# Altium PCB medusa-ai-integrated.PcbDoc (part 2 of 2)
Units mil, origin at the board's own origin, x right, y up, seen from the top; angles counter-clockwise.
Board outline 7750 x 7750 mil, 4 copper layers (Top Layer, Layer 1, Layer 2, Bottom Layer), stack 23.756 mil thick; 101 components, 83 nets, 484 pads, 157 vias.
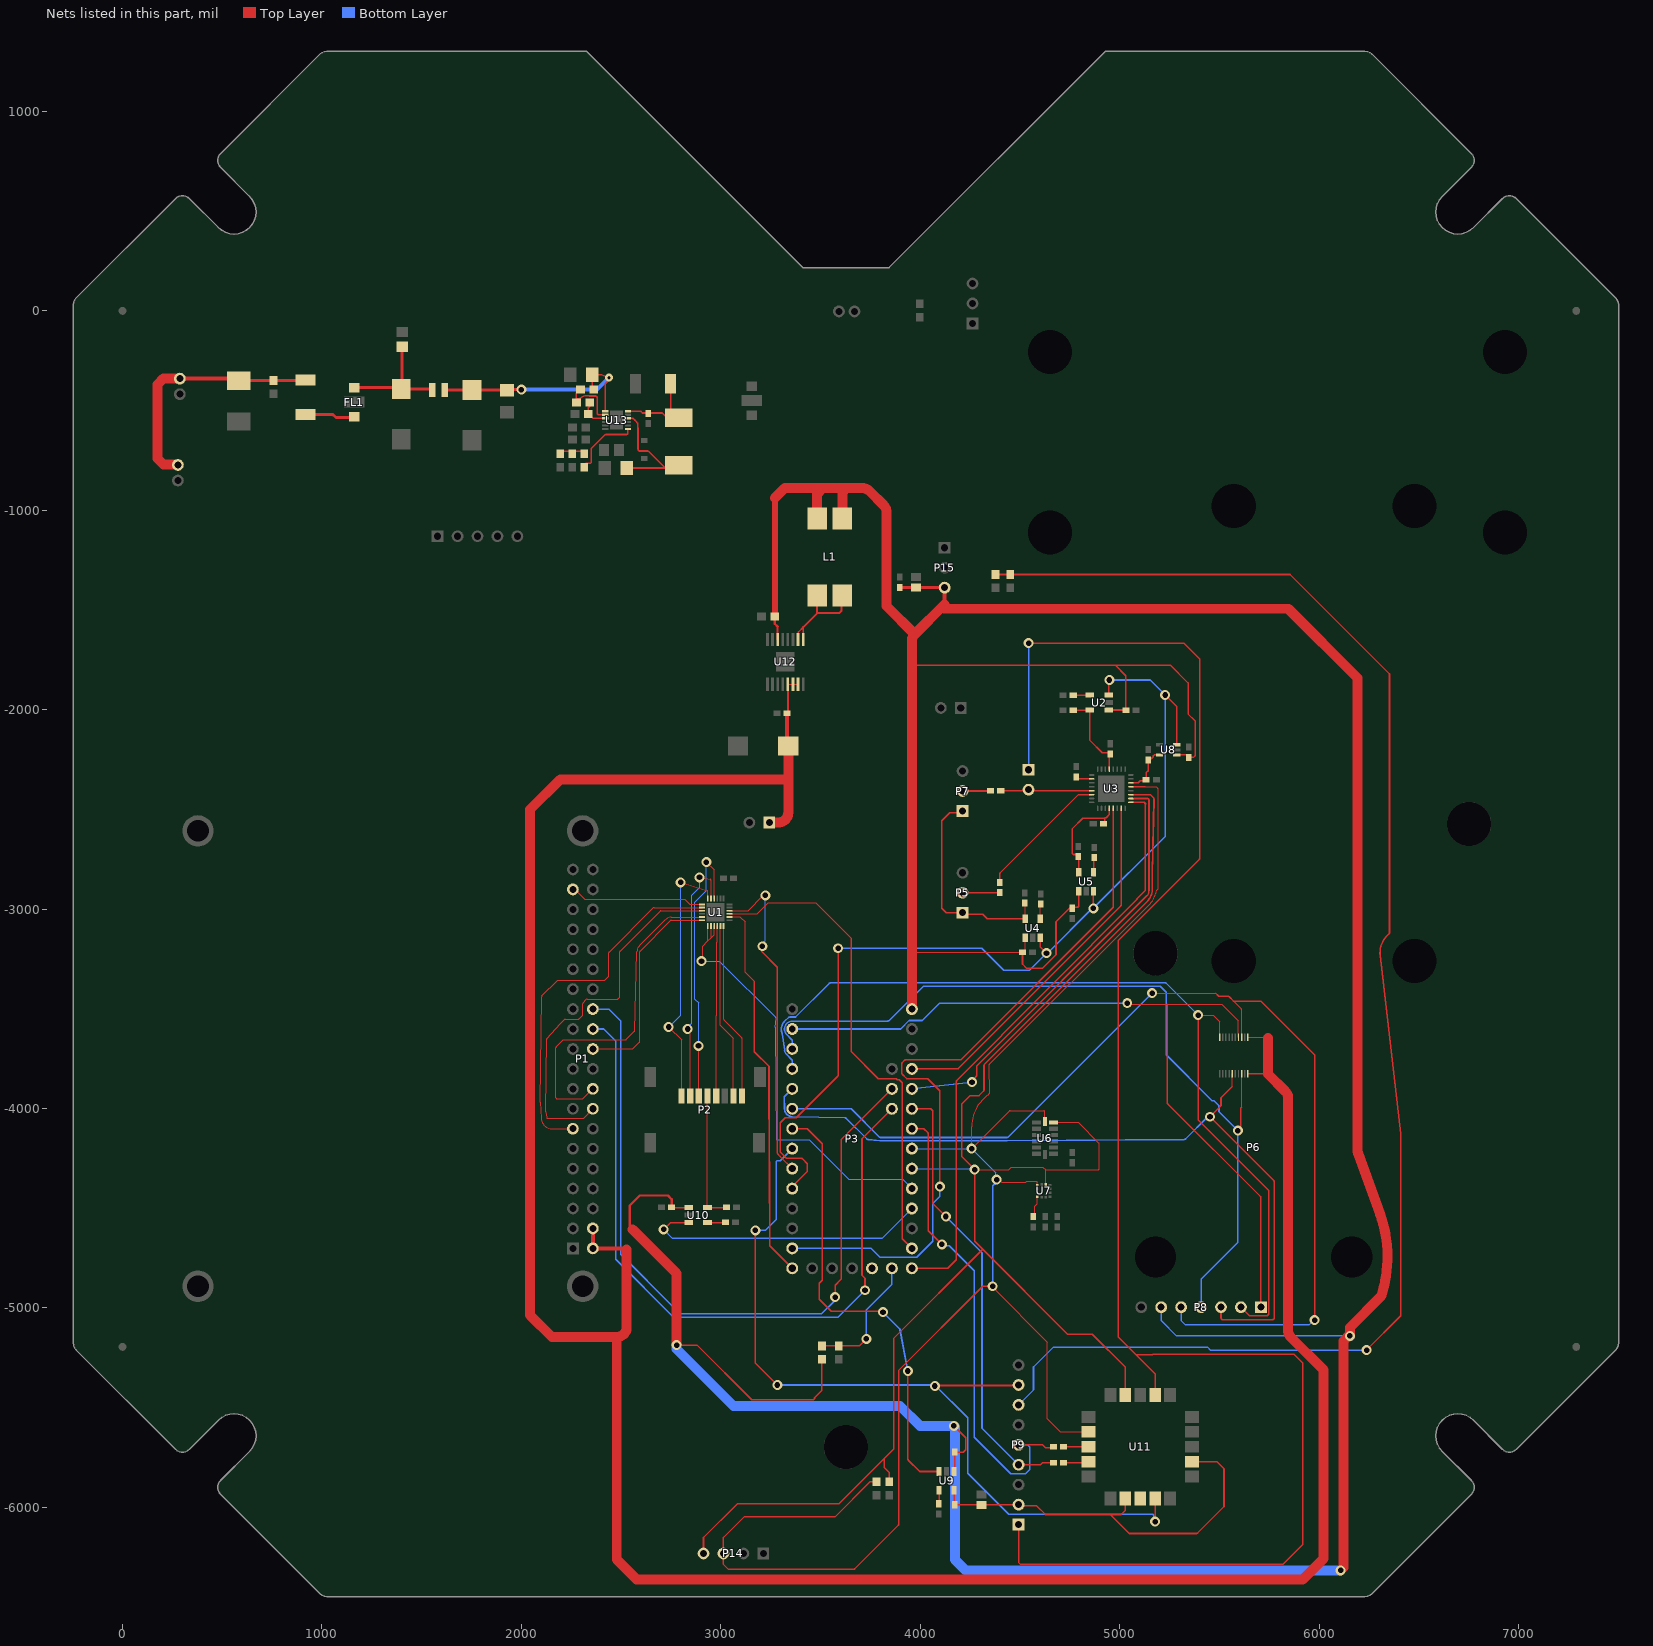
[diagram p4: the nets of this part, all layers, seen from the top]

## Via types
v1: diameter 50, hole 28, Top Layer to Bottom Layer, tented both sides, 63 vias
v2: diameter 28, hole 15, Top Layer to Bottom Layer, tented both sides, 61 vias
v3: diameter 50, hole 28, Top Layer to Bottom Layer, 22 vias
v4: diameter 40, hole 16, Top Layer to Bottom Layer, tented both sides, 4 vias
v5: diameter 19.68, hole 7.87, Top Layer to Bottom Layer, 4 vias
v6: diameter 38, hole 16, Top Layer to Bottom Layer, tented both sides, 2 vias
v7: diameter 40, hole 16, Top Layer to Bottom Layer, 1 vias

## Nets (pads, with @x,y where several pads share a name; then routed paths per layer and width w, separated by ;. In a path a pad name is that pad's centre, name@x,y a point inside that pad or via, vN(x,y) a via of type N, cw(c..) or ccw(c..) an arc to the next point about the centre after c; other vN are vias at no path point) (continued)
GPIO23: P1.16 U1.21 | length 1864
  Top Layer w6: 2198.27,-3571.15 2128.43,-3649.67 ccw(c2132.92,-3653.66) 2126.92,-3653.55 2121.99,-4017.22 ccw(c2127.99,-4017.3) 2122.05,-4018.19 2126.13,-4044.4 ccw(c2132.06,-4043.45) 2132.06,-4049.45 2307.47,-4049.45 ccw(c2307.47,-4043.45) 2311.72,-4047.69 P1.16@2358.31,-4001.1 ; 2198.28,-3571.13 cw(c2227.27,-3596.51) 2199.99,-3569.3 2216.43,-3552.86 cw(c2220.68,-3557.1) 2220.68,-3551.1 2285.82,-3551.1 ccw(c2285.82,-3545.1) 2290.06,-3549.35 2306.57,-3532.84 ccw(c2302.31,-3528.62) 2308.31,-3528.62 2308.31,-3473.55 cw(c2314.31,-3473.59) 2310.03,-3469.38 2326.55,-3452.86 cw(c2330.79,-3457.1) 2330.79,-3451.1 2480.82,-3451.1 ccw(c2480.82,-3445.1) 2485.06,-3449.35 2493.31,-3441.1 2493.31,-3214.14 cw(c2499.31,-3214.18) 2495.03,-3209.97 2695.39,-3009.61 cw(c2699.61,-3013.87) 2699.61,-3007.87 U1.21@2906.46,-3007.87
GPIO24: P1.18 U1.23 | length 1693
  Top Layer w6: P1.18@2358.31,-3901.1 2308.31,-3951.1 2179.31,-3951.1 cw(c2179.31,-3945.1) 2173.31,-3945.1 2173.31,-3694.14 cw(c2179.31,-3694.18) 2175.03,-3689.97 2210,-3655 2521.92,-3655 ccw(c2521.92,-3649) 2526.17,-3653.24 2566.55,-3612.86 ; 2566.57,-3612.84 ccw(c2562.28,-3608.64) 2568.28,-3608.81 2579.32,-3213.57 cw(c2625.83,-3214.98) 2592.84,-3182.16 2720.68,-3054.32 ; 2720.7,-3054.3 cw(c2752.56,-3086.21) 2752.21,-3041.12 2891.76,-3039.79 2894.5,-3039.79 U1.23@2906.46,-3039.37
GPIO25: P1.22 U1.24 | length 1081.1
  Top Layer w6: P1.22@2358.31,-3701.1 2558.31,-3701.1 2591.55,-3667.86 ccw(c2587.31,-3663.62) 2593.31,-3663.62 2593.31,-3214.14 cw(c2599.31,-3214.18) 2595.03,-3209.97 2748.14,-3056.86 cw(c2752.37,-3061.12) 2752.37,-3055.12 U1.24@2906.46,-3055.12
GPIO26: P1.37 U1.19 | length 679.3
  Top Layer w6: P1.37@2258.31,-2901.1 2268.31,-2901.1 2318.31,-2951.1 2818.31,-2951.1 2843.58,-2976.38 U1.19@2906.46,-2976.38
GPIO27: P1.13 U1.20 | length 1858.6
  Top Layer w6: 2095.78,-3969.17 ccw(c2101.78,-3969.21) 2095.79,-3969.52 2100.05,-4047.62 cw(c2094.06,-4048.02) 2100.06,-4048.01 ccw(c2153.31,-4047.86) 2153.31,-4101.1 P1.13@2258.31,-4101.1 ; 2095.78,-3969.15 2101.05,-3439.28 cw(c2107.05,-3439.36) 2102.81,-3435.12 2181.82,-3356.1 2418.31,-3356.1 2438.31,-3336.1 2438.31,-3219.14 cw(c2444.31,-3219.18) 2440.03,-3214.97 2661.14,-2993.86 cw(c2665.36,-2998.13) 2665.36,-2992.13 U1.20@2906.46,-2992.13
GPS_EN: P3.5 U9.3 | length 2273.9
  Top Layer w8: P3.5@3358.31,-4101.1 3433.31,-4101.1 3508.31,-4176.1 3508.31,-4861.1 3493.31,-4876.1 3493.31,-4956.1 3553.31,-5016.1 3808.31,-5016.1 v3(3813.31,-5021.1) ; v3(3938.31,-5316.1) 3938.34,-5757.82 ccw(c3946.34,-5757.82) 3940.65,-5763.45 3997.44,-5820.24 U9.3@4095.04,-5820.24
  Bottom Layer w8: v3(3813.31,-5021.1) 3896.57,-5104.36 ; 3896.59,-5104.38 cw(c3890.91,-5110.02) 3898.77,-5108.52 v3(3938.31,-5316.1)
GPS_PIN: P3.6 P9.8 U11.19 | length 4238
  Top Layer w8: v3(3173.31,-4611.1) 3173.31,-5276.1 v1(3283.31,-5386.1) ; v1(4073.31,-5391.1) 4075.81,-5388.6 4490.81,-5388.6 P9.8@4493.31,-5386.1 ; v1(5178.31,-6071.1) 5178.31,-5955.79 U11.19@5178.27,-5955.75
  Bottom Layer w8: v3(3173.31,-4611.1) 3223.31,-4611.1 3278.31,-4556.1 3278.31,-4265.79 3282.99,-4261.1 3298.31,-4261.1 P3.6@3358.31,-4201.1 ; v1(3283.31,-5386.1) 4073.51,-5386.1 4238.31,-5550.9 4238.31,-5825.85 ccw(c4246.31,-5825.79) 4240.61,-5831.41 4440.97,-6031.77 ccw(c4446.62,-6026.1) 4446.62,-6034.1 5163.31,-6034.1 cw(c5163.31,-6042.1) 5171.31,-6042.1 5171.31,-6064.1 v1(5178.31,-6071.1)
GPS_RST: U11.18 | length 0.2
  Top Layer w8: U11.18@5103.31,-5955.91 U11.18@5103.46,-5955.75
HYDRO_EN: P3.8 U2.3 U4.3 U5.3 U8.3 | length 5000.6
  Top Layer w8: P3.8@3358.31,-4401.1 3358.31,-4391.1 3433.31,-4316.1 3433.31,-4276.1 3409.55,-4252.34 ccw(c3403.89,-4258) 3403.89,-4250 3333.31,-4250 cw(c3333.31,-4242) 3327.66,-4247.66 3300.64,-4220.64 cw(c3306.31,-4214.99) 3298.31,-4214.99 3298.31,-4071.1 3323.31,-4046.1 3378.31,-4046.1 3585.96,-3838.45 ccw(c3580.31,-3832.79) 3588.31,-3832.79 v1(3588.31,-3196.1) ; U4.3@4601.73,-3143.19 4601.73,-3189.53 v1(4633.31,-3221.1) ; v1(4868.31,-2996.1) 4868.31,-2911.42 U5.3@4869.84,-2909.88 ; U2.3@4945.55,-1926.84 4945.55,-1853.86 v1(4948.31,-1851.1) ; v1(5228.31,-1926.1) 5286.61,-1984.41 U8.3@5286.61,-2175.51
  Bottom Layer w8: v1(3588.31,-3196.1) 4308.31,-3196.1 4418.31,-3306.1 4548.31,-3306.1 v1(4633.31,-3221.1) 4638.31,-3221.1 4863.31,-2996.1 v1(4868.31,-2996.1) 5228.31,-2636.1 v1(5228.31,-1926.1) 5153.31,-1851.1 v1(4948.31,-1851.1)
I2SDIN: P3.22 U3.26 | length 2176
  Top Layer w8: v1(4259.51,-3867.1) 4281.69,-3837.73 ccw(c4275.31,-3832.91) 4283.31,-3832.91 4283.31,-3789.42 cw(c4291.31,-3789.42) 4285.65,-3783.76 5136.33,-2933.08 ccw(c5109.4,-2906.1) 5147.52,-2906.08 5147.52,-2453.36 5147.52,-2453.3 ccw(c5139.52,-2453.4) 5145.08,-2447.65 5145,-2447.56 ccw(c5139.43,-2453.32) 5142.96,-2446.13 ccw(c5139.44,-2453.32) 5139.53,-2445.32 5139.48,-2445.32 U3.26@5056.73,-2445.32
  Bottom Layer w8: P3.22@3958.31,-3901.1 v1(4259.51,-3867.1)
I2SDOUT: P3.13 U3.25 | length 3005
  Top Layer w8: P3.13@3958.31,-4801.1 4138.31,-4801.1 4181.31,-4758.1 4181.31,-3865.23 cw(c4189.31,-3865.27) 4183.65,-3859.61 5085.59,-2951.62 ccw(c5079.92,-2945.97) 5087.89,-2946.69 5128.31,-2906.27 5128.31,-2471.09 5122.22,-2465 ; U3.25@5056.73,-2465 5122.22,-2465 ; 5130.19,-2473.72 ccw(c5122.22,-2473) 5122.22,-2465
IN_L: C17.2 U3.14 | length 669.5
  Top Layer w8: C17.2@4398.31,-2865.51 4398.31,-2824.38 cw(c4406.31,-2824.42) 4400.62,-2818.79 4793.78,-2425.63 U3.14@4859.88,-2425.63
IN_R: C19.2 P10.2 U3.13 | length 456
  Top Layer w8: C19.2@4403.9,-2406.1 4533.31,-2406.1 4533.4,-2406.01 4859.82,-2406.01 U3.13@4859.88,-2405.94
IR_SLEEP: P3.4 P6.5 P8.5 | length 5390.3
  Top Layer w6: v1(5163.31,-3421.1) 5481.1,-3421.1 ; 5571.1,-3461.1 5610.07,-3500.07 cw(c5605.81,-3504.3) 5611.81,-3504.3 P6.5@5611.81,-3642.24
  Top Layer w8: 5481.1,-3421.1 5494.78,-3434.78 ccw(c5500.39,-3429.08) 5500.34,-3437.08 5543.77,-3437.08 cw(c5543.77,-3445.08) 5549.42,-3439.42 5571.08,-3461.08 5708.31,-3461.1 5978.31,-3731.1 v1(5978.31,-5061.1)
  Bottom Layer w8: P3.4@3358.31,-4001.1 3653.63,-4001.1 3795.18,-4142.66 ccw(c3800.84,-4137) 3800.84,-4145 4436.1,-4145 ccw(c4436.1,-4137) 4441.75,-4142.66 v1(5163.31,-3421.1) ; P8.5@5308.31,-4996.1 5308.31,-5063.31 5330,-5085 5949.88,-5085 5973.78,-5061.1 v1(5978.31,-5061.1)
LRCLK: P3.23 U3.23 | length 1875.6
  Top Layer w8: P3.23@3958.31,-3801.1 4185.58,-3801.1 ccw(c4185.58,-3793.1) 4191.23,-3798.77 5005.21,-2984.79 ccw(c4999.52,-2979.17) 5007.52,-2979.17 U3.23@5007.52,-2494.53
MCLK: P3.11 U3.21 | length 3683
  Top Layer w8: 3926.58,-3756.1 ccw(c3926.62,-3764.1) 3920.98,-3758.43 3910.65,-3768.76 ccw(c3916.31,-3774.42) 3908.31,-3774.42 3908.31,-3822.85 ccw(c3916.31,-3822.79) 3910.61,-3828.41 3931.01,-3848.8 ccw(c3936.62,-3843.1) 3936.56,-3851.1 4038.31,-3851.1 4098.31,-3911.1 v1(4098.31,-4391.1) ; 3926.62,-3756.1 4199.99,-3756.1 ccw(c4199.99,-3748.1) 4205.64,-3753.77 4965.84,-2993.57 ccw(c4960.15,-2987.95) 4968.15,-2987.95 U3.21@4968.15,-2494.53
  Bottom Layer w8: P3.11@3358.31,-4701.1 3753.31,-4701.1 3798.31,-4746.1 3983.31,-4746.1 4060.96,-4668.45 ccw(c4055.31,-4662.79) 4063.31,-4662.79 4063.31,-4479.42 cw(c4071.31,-4479.42) 4065.64,-4473.77 4095.99,-4443.42 ccw(c4090.31,-4437.79) 4098.31,-4437.79 v1(4098.31,-4391.1)
MISO: P3.12 U1.8 | length 1921.5
  Top Layer w6: U1.8@3042.68,-3039.37 3094.09,-3039.37 cw(c3094.09,-3045.37) 3098.3,-3041.09 3121.57,-3064.36 cw(c3117.31,-3068.59) 3123.31,-3068.59 3123.31,-3316.1 3168.31,-3361.1
  Top Layer w8: 3168.31,-3361.1 3168.31,-3714.82 3241.59,-3788.1 3241.59,-3844.67 3245.65,-4685.19 ccw(c3253.65,-4685.13) 3247.97,-4690.77 P3.12@3358.31,-4801.1
MOSI: P3.7 U1.10 | length 1651.5
  Top Layer w6: U1.10@3042.68,-3007.87 3136.54,-3007.87 3213.31,-2931.1 v1(3223.31,-2931.1)
  Top Layer w8: v1(3208.31,-3186.1) 3206.21,-3188.2 3206.21,-3214.01 3280.93,-3288.73 3280.97,-3288.77 cw(c3275.25,-3294.36) 3283.25,-3294.37 3282.31,-4071.08 3282.31,-4214.99 ccw(c3306.31,-4214.99) 3289.14,-4231.76 3297.34,-4240.14 P3.7@3358.31,-4301.1
  Bottom Layer w6: v1(3208.31,-3186.1) 3208.31,-3174.2 3223.31,-3159.2 v1(3223.31,-2931.1)
NetAv: P3.2 P6.19 P8.2 | length 4484.6
  Top Layer w6: v1(5393.31,-3531.1) 5468.31,-3531.1 5501.57,-3564.37 P6.19@5501.57,-3642.24
  Top Layer w8: v1(5393.31,-3531.1) 5393.31,-4056.3 5745.49,-4408.49 cw(c5739.83,-4414.14) 5747.83,-4414.14 5747.83,-5029.39 cw(c5739.83,-5029.35) 5743.93,-5036.22 ccw(c5747.96,-5043.13) 5742.33,-5037.44 5742.11,-5037.66 cw(c5736.46,-5032) 5736.46,-5040 5655.52,-5040 cw(c5655.52,-5032) 5649.86,-5037.66 P8.2@5608.31,-4996.1
  Bottom Layer w8: P3.2@3358.31,-3801.1 3358.31,-3760.98 3358.31,-3760.93 ccw(c3350.31,-3761.04) 3356.12,-3755.54 3329.89,-3727.82 cw(c3358.31,-3701.1) 3319.71,-3706.71 3308.06,-3625.36 ccw(c3284.31,-3628.76) 3306.78,-3620.34 cw(c3358.31,-3601.1) 3320.96,-3560.73 3339.88,-3543.23 cw(c3345.31,-3549.1) 3345.2,-3541.1 3345.25,-3541.1 3374.88,-3541.1 3543.63,-3372.34 cw(c3549.29,-3378) 3549.29,-3370 5228.89,-3370 cw(c5228.89,-3378) 5234.55,-3372.34 v1(5393.31,-3531.1)
NetC7_1: C7.1 U2.4 | length 84.3
  Top Layer w8: C7.1@4767.36,-1928.37 4768.9,-1926.84 U2.4@4851.06,-1926.84
NetC12_1: C12.1 U4.4 | length 75.1
  Top Layer w6: U4.4@4601.73,-3048.7 4601.73,-2978.46 C12.1@4605.2,-2975
NetC13_1: C13.1 U3.10 | length 81
  Top Layer w8: C13.1@4783.31,-2336.69 4783.31,-2337.11 4793.09,-2346.89 U3.10@4859.88,-2346.89
NetC16_1: C16.1 U5.4 | length 75.1
  Top Layer w8: U5.4@4869.84,-2815.39 4869.84,-2745.16 C16.1@4873.31,-2741.69
NetC17_1: C17.1 P5.2 | length 186.3
  Top Layer w8: P5.2@4212.44,-2917.64 4397.36,-2917.64 C17.1@4398.31,-2916.69
NetC19_1: C19.1 P7.2 | length 140.9
  Top Layer w8: P7.2@4212.44,-2407.64 4351.18,-2407.64 C19.1@4352.72,-2406.1
NetC20_2: C20.2 U7.4 | length 108
  Top Layer w6: C20.2@4567.44,-4542.05 4573.31,-4536.18 4573.31,-4491.1 4587.44,-4476.97 U7.4@4587.44,-4442.32
NetC29_2: C29.2 U9.4 | length 68.2
  Top Layer w8: C29.2@4092.44,-5981.89 4095.04,-5979.29 U9.4@4095.04,-5914.72
NetC30_2: C30.2 U10.4 | length 89.4
  Top Layer w8: U10.4@2933.66,-4571.97 3021.85,-4571.97 C30.2@3022.72,-4571.1
NetC32_1: C32.1 U11.14 | length 127
  Top Layer w8: C32.1@4718.9,-5776.1 4838.23,-5776.1 U11.14@4843.62,-5770.71
NetC33_1: C33.1 U11.13 | length 124.8
  Top Layer w8: C33.1@4718.9,-5696.1 4843.43,-5696.1 U11.13@4843.62,-5695.91
NetC39_2: C39.2 C41.1 C44.2 L2.2 R10.1 U13.1 | length 1199.1
  Top Layer w8: C41.1@1751.46,-397.64 C41.1@1752.44,-396.65 ; C44.2@1926.58,-396.65 C44.2@1927.44,-397.52 C44.2@1929.96,-395 ; R10.1@2363.46,-400 2355.12,-391.65 C39.2@2355.12,-320 2399.69,-320 cw(c2399.69,-328) 2402.57,-320.54 v4(2440,-335) 2440,-346.37 2420.44,-365.92 U13.1@2420.44,-503.64
  Top Layer w15: L2.2@1615.43,-397.64 C41.1@1751.46,-397.64 ; C41.1@1752.44,-396.65 C44.2@1926.58,-396.65 ; C44.2@1929.96,-395 v3(2000,-395)
  Bottom Layer w20: v3(2000,-395) 2380,-395 v4(2440,-335)
NetC40_1: C40.1 C43.2 FL1.3 L2.1 | length 609
  Top Layer w8: C40.1@1390.59,-384.8 C40.1@1397.44,-391.65 C40.1@1402.44,-386.65 ; L2.1@1546.46,-391.65 L2.1@1552.44,-397.64
  Top Layer w15: FL1.3@1162.44,-384.8 C40.1@1390.59,-384.8 ; C40.1@1397.44,-391.65 L2.1@1546.46,-391.65 ; C40.1@1402.44,-386.65 C43.2@1402.44,-180.04
NetC45_2: C45.2 D3.K L3.1 U13.12 | length 351
  Top Layer w8: U13.12@2534.44,-503.64 2599.03,-503.64 2607.44,-512.05 2640,-512.05 2705.95,-512.05 2719.06,-525.16 ; L3.1@2749.06,-525.16 D3.K@2749.06,-367.64
NetD1_K: D1.K FL1.1 | length 253.4
  Top Layer w8: FL1.1@1157.91,-535 FL1.1@1162.44,-530.47
  Top Layer w15: D1.K@917.44,-519.25 1054.25,-519.25 1070,-535 FL1.1@1157.91,-535
NetL1_1: L1.1 U12.1 U12.2 | length 529.2
  Top Layer w6: U12.2@3387.44,-1647.64 3387.44,-1614.45 cw(c3393.44,-1614.45) 3389.18,-1610.23
  Top Layer w8: 3389.18,-1610.23 3413.03,-1586.38 U12.1@3413.03,-1647.64
  Top Layer w10: 3413.03,-1586.38 3483.31,-1516.1 ; L1.1@3483.31,-1426.1 3483.31,-1516.1 ; L1.1@3609.29,-1426.1 3605,-1430.39 3605,-1505 3593.9,-1516.1 3483.31,-1516.1
NetR7_2: 7.2 9.2 U13.3 | length 154
  Top Layer w8: 9.2@2343.46,-460 2343.46,-478.03 2335.91,-485.59 7.2@2335.91,-517.64 2337.87,-517.64 2358.87,-538.64 U13.3@2420.44,-538.64
NetR9_1: 9.1 R10.2 U13.2 | length 325.6
  Top Layer w8: 9.1@2275.64,-470.64 9.1@2275.64,-440.64 ; R10.2@2296.54,-390 2277.98,-408.55 ccw(c2283.64,-414.21) 2275.64,-414.21 9.1@2275.64,-440.64 ; U13.2@2420.44,-520.64 2387.96,-520.64 cw(c2388,-512.64) 2380,-512.68 2380,-434.69 ccw(c2372,-434.69) 2372,-426.69 2341.81,-426.69 cw(c2341.81,-414.69) 2336.96,-425.66 ccw(c2333.78,-433) 2333.82,-425 2325.02,-425 ccw(c2325,-462.9) 2296.48,-437.93 cw(c2290.49,-432.64) 2290.53,-440.64 9.1@2275.64,-440.64
NetR12_1: 12.1 13.2 R14.2 | length 120
  Top Layer w8: R14.2@2197.44,-704.17 2255,-704.17 12.1@2317.44,-704.17
PGM: P3.PGM
PI_STATUS: P1.26 P3.A10 | length 3753.8
  Top Layer w8: v3(3573.31,-4946.1) 3573.31,-4886.1 3603.31,-4856.1 3603.31,-4156.1 P3.A10@3858.31,-3901.1
  Bottom Layer w8: P1.26@2358.31,-3501.1 2438.31,-3501.1 2498.31,-3561.1 2498.31,-4731.1 2765.71,-4998.5 2765.71,-5024.02 2770.39,-5028.7 3502.39,-5028.7 ccw(c3502.39,-5020.7) 3508.04,-5026.37 3568.31,-4966.1 3568.31,-4951.1 v3(3573.31,-4946.1)
PI_STATUS2: P1.24 P3.A11 | length 3639.2
  Top Layer w8: v3(3723.31,-4911.1) 3723.31,-4851.1 3708.31,-4836.1 3708.31,-4151.1 P3.A11@3858.31,-4001.1
  Bottom Layer w8: P1.24@2358.31,-3601.1 2413.31,-3601.1 2473.31,-3661.1 2473.31,-4756.1 2763.31,-5046.1 3588.31,-5046.1 v3(3723.31,-4911.1)
PPS: P9.1 P10.1 U11.7 | length 8890.4
  Top Layer w8: P9.1@4493.31,-6086.1 4493.31,-6276.1 4503.31,-6286.1 5818.31,-6286.1 5918.31,-6186.1 5918.31,-5276.1 5873.31,-5231.1 5168.31,-5231.1 5165.81,-5233.6 5080.81,-5233.6 ; v1(4543.31,-1666.1) 5323.31,-1666.1 5402.31,-1745.1 5402.31,-2744.38 cw(c5394.31,-2744.38) 5399.99,-2750.01 4995.62,-3154.38 ccw(c5001.31,-3160.01) 4993.31,-3159.97 4993.31,-5142.79 ccw(c5001.31,-5142.79) 4995.65,-5148.45 5080.81,-5233.6 ; U11.7@5178.27,-5436.06 5178.27,-5331.06 5080.81,-5233.6
  Bottom Layer w8: P10.1@4543.31,-2301.1 v1(4543.31,-1666.1)
RI: P3.3 P6.12 P8.3 | length 4096.9
  Top Layer w6: 5564.57,-3889.84 P6.12@5564.57,-3826.1
  Top Layer w8: P8.3@5508.31,-4996.1 5508.31,-5050.35 ccw(c5516.31,-5050.31) 5516.27,-5058.31 5767,-5058.31 ccw(c5767,-5050.31) 5775,-5050.31 5775,-4366.11 ccw(c5767,-4366.11) 5772.66,-4360.45 5708.31,-4296.1 v1(5453.31,-4041.1) 5508.31,-3986.1 5508.31,-3946.1 5564.57,-3889.84
  Bottom Layer w8: P3.3@3358.31,-3901.1 3320.65,-3938.76 ccw(c3326.31,-3944.42) 3318.31,-3944.56 3319.31,-4001.79 ccw(c3358.31,-4001.1) 3357.27,-4040.09 3623.58,-4047.1 ccw(c3623.77,-4039.1) 3623.73,-4047.1 cw(c3623.79,-4055.1) 3629.43,-4049.43 3732.64,-4152.64 ccw(c3738.3,-4146.98) 3737.75,-4154.96 cw(c3737.21,-4162.95) 3737.98,-4154.98 3798.51,-4160.89 ccw(c3800.84,-4137) 3800.84,-4161 4436.1,-4161 ccw(c4436.1,-4137) 4436.26,-4161 5324.83,-4154.96 ccw(c5324.77,-4146.96) 5330.35,-4152.69 ; 5330.39,-4152.66 5441.94,-4041.1 v1(5453.31,-4041.1)
RX: P3.0 P6.7 P8.1 | length 4124.2
  Top Layer w6: v1(5038.31,-3471.1) 5043.31,-3476.1 5238.31,-3476.1 5511.39,-3476.1 5596.06,-3560.78 P6.7@5596.06,-3642.24
  Top Layer w8: 5238.31,-3476.1 5238.31,-3969.99 ccw(c5246.31,-3969.99) 5240.64,-3975.64 5705.98,-4440.98 cw(c5700.31,-4446.62) 5708.31,-4446.62 P8.1@5708.31,-4996.1
  Bottom Layer w8: P3.0@3358.31,-3601.1 3901.74,-3601.1 3944.21,-3558.63 4010.78,-3558.63 4098.31,-3471.1 v1(5038.31,-3471.1)
RXD2: C33.2 P3.20 P9.5 | length 2446.5
  Top Layer w8: P3.20@3958.31,-4101.1 4018.31,-4101.1 4037.66,-4120.45 cw(c4032,-4126.11) 4040,-4126.11 4040,-4609.48 ccw(c4048,-4609.48) 4042.34,-4615.14 v1(4108.31,-4681.1) ; P9.5@4493.31,-5686.1 4613.31,-5686.1 4628.31,-5701.1 4662.72,-5701.1 C33.2@4667.72,-5696.1
  Bottom Layer w8: v1(4108.31,-4681.1) 4115.31,-4688.1 4145.31,-4688.1 4270.81,-4813.6 4270.81,-5645.29 ccw(c4278.81,-5645.29) 4273.14,-5650.93 4450.99,-5828.79 ccw(c4456.62,-5823.1) 4456.58,-5831.1 4528.31,-5831.1 4548.31,-5811.1 4548.31,-5696.1 4538.31,-5686.1 P9.5@4493.31,-5686.1
SCK: P3.14 U1.9 | length 2447.3
  Top Layer w6: U1.9@3042.68,-3023.62 3182.4,-3023.62 3237.92,-2968.1 3475.31,-2968.1 3653.31,-3146.1
  Top Layer w8: 3653.31,-3146.1 3653.31,-3713.31 3790,-3850 3880,-3850 3885,-3855 3895,-3855 3910,-3870 3910,-4652.8 P3.14@3958.31,-4701.1
SCL: P3.19 P14.3 R15.1 U3.29 U6.14 U7.1 U11.12 | length 8525.7
  Top Layer w6: 4342.45,-3930.89 ccw(c4453.91,-4091.64) 4258.31,-4090.66 v1(4258.31,-4201.1) 4446.57,-4012.84 cw(c4450.79,-4017.1) 4450.79,-4011.1 4619.65,-4011.1 cw(c4619.65,-4017.1) 4625.65,-4017.1 U6.14@4625.65,-4065.81 ; 4342.47,-3930.88 ccw(c4339.03,-3925.96) 4345.03,-3925.94 4344.78,-3782.72 cw(c4350.78,-3782.71) 4346.52,-3778.48 5152.36,-2972.64 ccw(c5080.67,-2900.66) 5180.55,-2919.23 cw(c5220.84,-2927.26) 5191.59,-2898.41 ccw(c5187.31,-2894.21) 5193.31,-2894.24 ; v3(4363.31,-4891.1) 4363.31,-4896.1 4638.31,-5171.1 4638.31,-5556.1 4703.31,-5621.1 U11.12@4843.62,-5621.1 ; v1(4383.31,-4356.1) 4395.21,-4356.1 4408.21,-4369.1 4529.05,-4369.1 4533.3,-4364.85 4583.93,-4364.85 4587.44,-4368.36 U7.1@4587.44,-4383.27 ; 5128.15,-2386.26 5183.46,-2386.26 5191.55,-2394.35 cw(c5187.31,-2398.59) 5193.31,-2398.59 5193.31,-2894.21
  Top Layer w8: R15.1@3780,-5871.54 3748.46,-5871.54 3572.36,-6047.64 3116.77,-6047.64 3013.31,-6151.1 P14.3@3013.31,-6231.1 3013.31,-6286.1 3038.31,-6311.1 3664.99,-6311.1 ccw(c3664.99,-6303.1) 3670.64,-6308.77 3890.99,-6088.42 ccw(c3885.31,-6082.79) 3893.31,-6082.79 3893.31,-5311.61 4313.81,-4891.1 v3(4363.31,-4891.1) ; U3.29@5056.73,-2386.26 5128.15,-2386.26
  Bottom Layer w6: P3.19@3958.31,-4201.1 v1(4258.31,-4201.1) 4379.31,-4322.1 4379.31,-4352.1 v1(4383.31,-4356.1)
  Bottom Layer w8: v3(4363.31,-4891.1) 4363.31,-4387.47 4383.31,-4367.47 v1(4383.31,-4356.1)
SD1: P2.1 U1.18 | length 1310.4
  Top Layer w6: v1(2738.31,-3591.1) 2803.39,-3656.18 P2.1@2803.39,-3936.1 ; v1(2798.31,-2866.1) 2930.95,-2906.69 cw(c2929.2,-2912.43) 2935.2,-2912.43 U1.18@2935.2,-2947.64
  Bottom Layer w6: v1@2733.31,-3596.1 v1(2738.31,-3591.1) 2798.31,-3531.1 v1(2798.31,-2866.1)
SD2: P2.2 U1.17 | length 1255
  Top Layer w6: P2.2@2846.69,-3936.1 v1@2846.69,-3619.49 ; v1(2893.31,-2841.1) 2945.94,-2849.95 cw(c2944.94,-2855.87) 2950.95,-2855.87 U1.17@2950.95,-2947.64
  Bottom Layer w6: v1(2833.31,-3601.1) 2833.31,-3593.02 2853.31,-3573.02 2853.31,-2931.1 2893.31,-2891.1 v1(2893.31,-2841.1)
SD3: P2.3 U1.16 | length 1403.4
  Top Layer w6: P2.3@2890,-3936.1 v1@2890,-3686.1 ; v1(2927.34,-2764.27) 2966.69,-2803.62 U1.16@2966.69,-2947.64
  Bottom Layer w6: v1(2888.31,-3686.1) 2888.31,-3470.11 2869.31,-3451.11 2869.31,-2965.1 2927.34,-2907.07 v1(2927.34,-2764.27)
SD5: P2.5 U1.4 | length 853.1
  Top Layer w6: P2.5@2976.61,-3936.1 2976.61,-3534.94 2978.69,-3532.86 2978.69,-3166.1 ; 2982.44,-3166.1 U1.4@2982.44,-3083.86
SD7: P2.7 U1.5 | length 879.2
  Top Layer w6: U1.5@2998.19,-3083.86 2998.19,-3582.96 3063.23,-3647.99 P2.7@3063.23,-3936.1
SD8: P2.8 U1.6 | length 890.1
  Top Layer w6: U1.6@3013.94,-3083.86 3013.94,-3551.45 ccw(c3019.94,-3551.45) 3015.69,-3555.69 3104.8,-3644.8 cw(c3100.54,-3649.02) 3106.54,-3649.02 P2.8@3106.54,-3936.1
SD_EN: P3.16 U10.3 | length 1470.8
  Top Layer w8: v3(2713.31,-4606.1) 2747.44,-4571.97 U10.3@2844.17,-4571.97
  Bottom Layer w8: v3(2713.31,-4606.1) 2758.31,-4651.1 3808.31,-4651.1 P3.16@3958.31,-4501.1
SD_SWITCH: P3.17 U1.1 U1.2 U1.3 | length 2221
  Top Layer w6: v1(2903.31,-3261.1) 2908.31,-3256.1 2908.31,-3186.1 2935.2,-3159.21 ; U1.1@2935.2,-3083.86 2935.2,-3159.21 ; U1.2@2950.95,-3083.86 2950.95,-3143.46 ; U1.3@2966.69,-3083.86 2966.69,-3127.72 2950.95,-3143.46 ; 2935.2,-3159.21 2950.95,-3143.46
  Bottom Layer w6: v1(2903.31,-3261.1) 2993.31,-3261.1 3275.55,-3543.35 ; 3275.58,-3543.38 cw(c3271.28,-3547.56) 3277.25,-3548.17 3272.75,-3592.39 ccw(c3358.31,-3601.1) 3272.31,-3601.83 3277.31,-4150.13 ccw(c3283.31,-4150.1) 3283.31,-4156.1 3443.31,-4156.1 3641.22,-4354.01 3911.22,-4354.01 P3.17@3958.31,-4401.1
SDA: P3.18 P14.4 R5.1 U3.27 U6.13 U7.11 U11.9 | length 7906.7
  Top Layer w6: v1(4273.31,-4306.1) 4443.76,-4306.1 4456.76,-4293.1 4615.31,-4293.1 4628.31,-4306.1 ; U7.11@4628.78,-4381.3 4628.78,-4306.58 4628.31,-4306.1 ; U6.13@4668.86,-4069.65 4791.85,-4069.65 4896.55,-4174.35 cw(c4892.31,-4178.59) 4898.31,-4178.59 4898.31,-4300.1 cw(c4892.31,-4300.1) 4892.31,-4306.1 4628.31,-4306.1
  Top Layer w8: P14.4@2913.31,-6231.1 2913.31,-6151.1 3083.31,-5981.1 3593.31,-5981.1 3819.7,-5754.7 ; R5.1@3845,-5871.54 3845,-5825 3819.7,-5799.7 3819.7,-5754.7 ; U11.9@5028.66,-5436.06 5028.66,-5296.46 4863.31,-5131.1 4738.31,-5131.1 4313.31,-4706.1 ; U3.27@5056.73,-2425.63 5149.98,-2425.63 cw(c5149.98,-2433.63) 5155.63,-2427.97 5168.31,-2440.65 5169.96,-2442.3 5170,-2442.34 cw(c5164.28,-2447.94) 5172.28,-2448.12 5163.52,-2821.39 ; 5163.52,-2821.43 ccw(c5171.52,-2821.57) 5163.52,-2821.53 5163.52,-2906.06 cw(c5109.4,-2906.1) 5157.35,-2931.2 ccw(c5164.46,-2934.86) 5156.92,-2932.18 cw(c5081.93,-2905.51) 5138.12,-2961.88 4322.37,-3777.63 ccw(c4328,-3783.31) 4320,-3783.27 4320,-3906.69 cw(c4312,-3906.69) 4317.66,-3912.34 4295,-3935 4250.34,-3935 4209.31,-3976.03 4209.31,-4242.1 v1(4273.31,-4306.1) 4273.31,-4666.1 4313.31,-4706.1 ; 3819.7,-5754.7 3868.31,-5706.1 3868.31,-5151.1 4313.31,-4706.1
  Bottom Layer w6: P3.18@3958.31,-4301.1 v1@4278.31,-4301.1
SENSE: L3.2 R11.1 U13.10 | length 575.5
  Top Layer w8: R11.1@2527.56,-787.64 2704.98,-787.64 2721.51,-787.64 2708.25,-774.35 2638.92,-705.02 2638.87,-704.97 ccw(c2633.3,-710.72) 2637.36,-703.82 2637.26,-703.77 ccw(c2633.2,-710.66) 2633.2,-702.66 2593,-702.66 cw(c2593,-694.66) 2585,-694.66 2585,-587.72 ccw(c2577,-587.76) 2584.41,-584.75 cw(c2593.66,-580.94) 2583.66,-580.94 2583.66,-566.98 2583.66,-566.92 ccw(c2575.66,-567.03) 2581.84,-561.95 2575.57,-554.33 ccw(c2557.04,-569.59) 2574.01,-552.62 2569.09,-547.7 ccw(c2552.09,-564.64) 2567.01,-545.84 2561.68,-541.61 cw(c2566.66,-535.34) 2561.02,-541.02 2560.98,-540.98 ccw(c2555.32,-546.64) 2555.32,-538.64 U13.10@2534.44,-538.64 ; L3.2@2721.54,-787.64 L3.2@2732.44,-776.73
TX: P3.1 P6.6 P8.4 | length 4238.5
  Top Layer w6: 5611.81,-3992.6 P6.6@5611.81,-3826.1
  Top Layer w8: v1(5593.31,-4111.1) 5608.31,-4096.1 5608.31,-3996.1 5611.81,-3992.6
  Bottom Layer w8: P3.1@3358.31,-3701.1 3358.31,-3660.98 ccw(c3350.31,-3660.98) 3356.11,-3655.48 3330,-3627.93 cw(c3358.31,-3601.1) 3358.23,-3562.1 3838.44,-3561.1 ccw(c3838.42,-3553.1) 3844.08,-3558.76 4016.74,-3386.1 5203.31,-3386.1 5233.31,-3416.1 5233.31,-3730.6 5463.56,-3960.85 5473.06,-3960.85 5498.31,-3986.1 5498.31,-4016.1 v1(5593.31,-4111.1) 5593.31,-4671.1 5408.31,-4856.1 P8.4@5408.31,-4996.1
TXD2: C32.2 P3.21 P9.4 | length 2240.8
  Top Layer w8: P3.21@3958.31,-4001.1 4053.31,-4001.1 4063.31,-4011.1 4063.31,-4476.1 v1(4128.31,-4541.1) ; P9.4@4493.31,-5786.1 4603.31,-5786.1 4613.31,-5776.1 C32.2@4667.72,-5776.1
  Bottom Layer w8: v1(4128.31,-4541.1) 4309.94,-4722.74 4309.94,-5602.74 P9.4@4493.31,-5786.1
V_BCKP: P9.7 R3.1 R4.2 | length 7603
  Top Layer w8: R4.2@4376.69,-1321.97 R3.1@4451.69,-1321.97 5854.17,-1321.97 6353.31,-1821.1 6353.31,-3118.38 cw(c6345.31,-3118.38) 6350.99,-3124.01 6340,-3135 ccw(c6425.55,-3218.82) 6306.56,-3232.44 ; v1(6238.31,-5211.1) 6407.66,-5041.75 ccw(c6402,-5036.1) 6410,-5036.1 6410,-4127.6 ccw(c6402,-4127.6) 6409.95,-4126.68 6306.56,-3232.49
  Bottom Layer w8: P9.7@4493.31,-5486.1 4568.31,-5411.1 4568.31,-5296.1 4668.31,-5196.1 5440.12,-5196.1 5455.12,-5211.1 v1(6238.31,-5211.1)
VA: C5.1 C8.1 U2.5 U3.5 | length 445
  Top Layer w8: C5.1@4767.36,-2003.37 4849.33,-2003.37 U2.5@4851.06,-2001.64 4851.06,-2153.86 4913.31,-2216.1 4947.72,-2216.1 C8.1@4953.31,-2221.69 4948.46,-2226.54 U3.5@4948.46,-2297.68
VCC5: C35.1 C36.1 P1.2 P1.4 P6.1 P6.2 P20.1 U12.13 U12.14 U12.15 | length 13604.8
  Top Layer w6: C36.1@3333.03,-2017.64 C36.1@3336.26,-2014.41 ; U12.13@3336.26,-1872.05 U12.14@3361.85,-1872.05 U12.15@3387.44,-1872.05 ; P6.1@5643.31,-3642.24 5739.45,-3642.24 5743.31,-3646.1
  Top Layer w8: 2523.31,-4701.1 2528.31,-4706.1 ; C35.1@3333.03,-2177.24 C35.1@3338.43,-2182.64 ; P6.2@5643.31,-3826.1 5743.31,-3826.1
  Top Layer w10: C36.1@3336.26,-2014.41 U12.13@3336.26,-1872.05
  Top Layer w20: P1.4@2358.31,-4601.1 P1.2@2358.31,-4701.1 2523.31,-4701.1 ; C35.1@3333.03,-2177.24 C36.1@3333.03,-2017.64
  Top Layer w50: 2528.31,-4706.1 2528.31,-5096.1 cw(c2478.31,-5096.1) 2478.31,-5146.1 ; P20.1@3243.31,-2566.1 3288.43,-2566.1 ccw(c3288.43,-2516.1) 3338.43,-2516.1 3338.43,-2349.37 ; C35.1@3338.43,-2182.64 3338.43,-2349.37 ; 5743.31,-3646.1 5743.31,-3826.1 5830.36,-3913.15 cw(c5795,-3948.51) 5845,-3948.51 5845,-5112.08 ccw(c5895,-5112.08) 5859.59,-5147.39 5859.64,-5147.44 6023.31,-5311.1 6023.31,-6256.1 5918.31,-6361.1 2578.31,-6361.1 2478.31,-6261.1 2478.31,-5146.1 ; 2478.31,-5146.1 2153.31,-5146.1 2043.31,-5036.1 2043.31,-2501.1 2195.04,-2349.37 3338.43,-2349.37
VCC_GPS: C26.1 C31.2 P9.2 U9.5 U11.2 U11.17 | length 2048.8
  Top Layer w8: U9.5@4169.84,-5914.72 4169.84,-5984.29 C26.1@4172.44,-5986.89 4274.09,-5986.89 4274.81,-5987.6 C31.2@4308.31,-5987.6 4309.02,-5986.89 4309.81,-5986.1 P9.2@4493.31,-5986.1 4498.31,-5991.1 4583.31,-5991.1 4628.31,-6036.1 4953.31,-6036.1 ; U11.17@5028.66,-5955.75 5028.66,-6015.75 5008.31,-6036.1 4953.31,-6036.1 ; U11.2@5363.31,-5770.71 5487.91,-5770.71 5523.31,-5806.1 5523.31,-5996.1 5390.65,-6128.76 cw(c5384.99,-6123.1) 5384.99,-6131.1 5051.56,-6131.1 cw(c5051.62,-6123.1) 5046,-6128.8 4953.31,-6036.1
VCC_SD: C28.1 P2.4 U10.5 | length 650.7
  Top Layer w6: P2.4@2933.31,-3936.1 2933.31,-4496.81 U10.5@2933.66,-4497.17
  Top Layer w8: U10.5@2933.66,-4497.17 3021.65,-4497.17 C28.1@3022.72,-4496.1
VDDD: C4.1 C24.1 U3.30 U8.5 | length 256
  Top Layer w8: U3.30@5056.73,-2366.57 5092.83,-2366.57 5103.31,-2356.1 5127.72,-2356.1 C4.1@5132.72,-2351.1 5132.72,-2316.69 5143.31,-2306.1 C24.1@5143.31,-2251.69 5148.9,-2246.1 5158.31,-2246.1 5168.31,-2236.1 5168.31,-2231.38 5172.99,-2226.69 U8.5@5200,-2226.69
VDDIO: C11.1 C14.1 U3.20 U5.5 | length 516.1
  Top Layer w8: U5.5@4795.04,-2815.39 4795.04,-2737.61 4783.53,-2726.1 4767.99,-2726.1 4763.31,-2721.42 4763.31,-2596.1 4814.77,-2544.64 4924.77,-2544.64 ; C11.1@4918.9,-2571.1 4924.77,-2565.23 4924.77,-2544.64 ; U3.20@4948.46,-2494.53 4948.46,-2525.94 4933.31,-2541.1 4928.31,-2541.1 4924.77,-2544.64
VFB: 12.2 U13.7 | length 345.1
  Top Layer w8: 12.2@2317.44,-771.1 2323.54,-765 2345.31,-765 2350,-760.31 2350,-690 2417.66,-622.34 ; 2417.69,-622.32 cw(c2423.28,-628.03) 2423.26,-620.03 2526.46,-619.78 ccw(c2526.44,-611.78) 2534.44,-611.9 2534.44,-611.84 U13.7@2534.44,-591.64
VH: C9.1 P5.1 P7.1 U4.5 | length 1083.7
  Top Layer w6: C9.1@4525.2,-2970 4526.93,-2971.73 U4.5@4526.93,-3048.7
  Top Layer w8: P7.1@4212.44,-2507.64 4203.98,-2516.1 4148.31,-2516.1 4108.31,-2556.1 4108.31,-2996.1 4127.5,-3015.29 ccw(c4133.16,-3009.64) 4133.16,-3017.64 P5.1@4212.44,-3017.64 4220.91,-3026.1 4313.31,-3026.1 4335.91,-3048.7 U4.5@4526.93,-3048.7
VIN: C2.2 C3.1 C6.1 C10.1 C15.1 C23.1 C25.1 C27.1 C37.2 L1.2 P3.Vin P8.6 P15.3 R1.2 U2.1 U4.1 U5.1 U8.1 U9.1 U10.1 U12.6 | length 22810.8
  Top Layer w6: 2543.31,-4591.1 2558.31,-4606.1 ; 3958.31,-3226.1 3968.31,-3216.1 C10.1@4512.72,-3216.1 4516.15,-3216.1 4526.93,-3205.32 U4.1@4526.93,-3143.19
  Top Layer w8: C27.1@2753.9,-4496.1 2754.96,-4497.17 U10.1@2839.17,-4497.17 ; v3(2778.31,-5186.1) 2881.1,-5186.1 3155,-5460 3465.31,-5460 3470,-5455.31 3470,-5450 3506.69,-5413.31 R1.2@3506.69,-5257.36 ; C3.1@3898.31,-1386.69 C3.1@3899.25,-1387.64 ; 3958.31,-1777.64 4979.84,-1777.64 ; v1(4168.31,-5591.1) 4228.31,-5651.1 4228.31,-5711.1 4216.34,-5723.07 C25.1@4172.44,-5723.07 4172.44,-5817.64 U9.1@4169.84,-5820.24 ; C10.1@4512.72,-3216.1 4512.72,-3275.51 4533.31,-3296.1 4613.51,-3296.1 4680.91,-3228.7 4680.91,-3063.5 4753.9,-2990.51 4787.04,-2990.51 ccw(c4787.04,-2982.51) 4795.04,-2982.51 U5.1@4795.04,-2909.88 ; U2.1@4945.55,-2001.64 5029.45,-2001.64 C6.1@5031.18,-2003.37 5031.18,-1828.98 4979.84,-1777.64 ; U8.1@5286.61,-2226.69 5333.53,-2226.69 5343.31,-2236.47 C23.1@5343.31,-2236.69 ; C23.1@5345.75,-2238.81 5370.6,-2238.81 5377.66,-2231.75 ccw(c5372,-2226.1) 5380,-2226.1 5380,-2061.11 ccw(c5372,-2061.11) 5377.66,-2055.45 5343.31,-2021.1 5343.31,-1866.1 5254.84,-1777.64 4979.84,-1777.64
  Top Layer w10: U12.6@3285.08,-1647.64 3285.08,-1582.87
  Top Layer w12: 2543.31,-4591.1 2543.31,-4486.1 2593.31,-4436.1 2734.49,-4436.1 2753.9,-4455.51 C27.1@2753.9,-4496.1 ; C37.2@3270.91,-1532.64 3270.91,-1568.7 3285.08,-1582.87
  Top Layer w15: C3.1@3899.25,-1387.64 P15.3@4122.44,-1387.64
  Top Layer w20: 4122.44,-1471.97 P15.3@4122.44,-1387.64
  Top Layer w30: C37.2@3270.91,-1532.64 3270.91,-938.5
  Top Layer w50: 2558.31,-4606.1 2778.31,-4826.1 v3(2778.31,-5186.1) ; 3270.91,-938.5 3321.16,-888.25 3512.6,-888.25 ; L1.2@3483.31,-1040.28 3483.31,-917.54 3512.6,-888.25 ; L1.2@3609.29,-1040.28 3609.29,-909.41 3630.45,-888.25 ; P3.Vin@3958.31,-3501.1 3958.31,-3226.1 3958.31,-1777.64 3958.31,-1656.71 cw(c4008.31,-1656.81) 3972.86,-1621.55 ; 4122.44,-1493.6 5845.81,-1493.6 6193.31,-1841.1 6193.31,-4209.22 ccw(c6243.31,-4209.08) 6196.23,-4225.91 6305.98,-4530.19 cw(c5708.91,-4744.06) 6311.89,-4940.63 6155,-5097.52 v1(6155,-5140) ; 4122.44,-1471.97 3972.86,-1621.55 ; v3(6108.31,-6316.1) 6123.31,-6301.1 6123.31,-5165.39 v1@6151.85,-5136.85 ; 3512.6,-888.25 3630.45,-888.25 ; 3630.45,-888.25 3709.74,-888.25 cw(c3709.74,-938.25) 3745.1,-902.89 3816.76,-974.55 cw(c3781.4,-1009.91) 3831.4,-1009.91 3831.4,-1480.09 3972.86,-1621.55
  Bottom Layer w8: P8.6@5208.31,-4996.1 5208.31,-5063.31 5285,-5140 v1(6155,-5140)
  Bottom Layer w50: v3(2778.31,-5186.1) 2778.31,-5206.1 3048.36,-5476.16 3063.31,-5491.1 3898.31,-5491.1 3998.31,-5591.1 v1(4168.31,-5591.1) 4173.31,-5596.1 4173.31,-6261.1 4228.31,-6316.1 v3(6108.31,-6316.1)
VSENS: P3.A14 R1.1 R2.2 | length 645
  Top Layer w8: R1.1@3506.69,-5190.43 R2.2@3591.69,-5190.43 3694.57,-5190.43 v1(3730,-5155)
  Bottom Layer w8: v1(3730,-5155) 3730,-5010 3858.31,-4881.69 P3.A14@3858.31,-4801.1
VSOLAR: C42.2 D1.A D2.1 P24.1 P25.1 | length 1247.9
  Top Layer w8: D2.1@571.69,-339.53 D2.1@582.44,-350.28 ; C42.2@756.34,-350.28 C42.2@757.44,-349.17 ; D1.A@914.29,-349.17 D1.A@917.44,-346.02
  Top Layer w15: D2.1@582.44,-350.28 C42.2@756.34,-350.28 ; C42.2@757.44,-349.17 D1.A@914.29,-349.17
  Top Layer w20: P25.1@287.44,-339.53 D2.1@571.69,-339.53
  Top Layer w50: P24.1@277.44,-772.64 275.71,-770.91 205.91,-770.91 175,-740 175,-368.82 204.29,-339.53 P25.1@287.44,-339.53
pads on no net: P1.1 P1.3 P1.5 P1.7 P1.8 P1.10 P1.11 P1.12 P1.17 P1.19 P1.21 P1.23 P1.27 P1.28 P1.29 P1.31 P1.32 P1.33 P1.35 P1.36 P1.38 P1.40 P2.0 P3.3.3V2 P3.AGND P3.AREF P3.GND2 P3.VBat P6.0 P6.9 P6.10 P6.11 P6.13 P6.14 P6.16 P6.17 P6.20 P9.6 P9.9 P15.1 P21.2 U1.7 U1.12 U1.25 U3.2 U3.4 U3.6 U3.8 U3.9 U3.11 U3.12 U3.16 U3.17 U3.18 U3.19 U3.22 U3.28 U6.3 U6.8 U6.9 U6.10 U6.11 U7.7 U7.8 U8.4 U11.3 U11.8 U12.10 U12.12 U12.16 U13.8
copper on no net: | length 100
  Top Layer w10: 4103.31,-1991.1 4203.31,-1991.1

## Polygon pours and split planes (outlines as drawn)
DGND on Bottom Layer "DGND_L04_P001" (solid, pour order 1): 4390,-5200 4395,-5195 5755,-5195 5755,-6200 5750,-6205 4390,-6205
DGND on Top Layer "DGND_L01_P000" (solid, pour order 0): 4395,-5200 4400,-5205 5755,-5205 5755,-6195 5745,-6205 4390,-6205
3V3 on Layer 2 (split plane): 343 vertices, not listed, extent -227.46,-6427.54 7482.34,1282.27
VA on Layer 2 (split plane): 7482.34,-3441 4225.42,-3441 4158.41,-3373.99 4158.41,-1893.21 4296.91,-1754.71 4298.02,-1753.05 4298.41,-1751.1 4298.41,-843.21 4515.42,-626.2 7482.34,-626.2
DGND on Layer 1 (split plane): 343 vertices, not listed, extent -227.46,-6427.54 7482.34,1282.27
AGND on Layer 1 (split plane): 7482.34,-3441 4225.42,-3441 4158.41,-3373.99 4158.41,-1893.21 4296.91,-1754.71 4298.02,-1753.05 4298.41,-1751.1 4298.41,-843.21 4515.42,-626.2 7482.34,-626.2

## Other copper
Layer 1 (plane layer: these items are gaps in the copper):
  lines w10: 7498.31,-3446.1 4223.31,-3446.1 4153.31,-3376.1 4153.31,-1891.1 4293.31,-1751.1 4293.31,-841.1 4513.31,-621.1 7503.31,-621.1
Layer 2 (plane layer: these items are gaps in the copper):
  lines w10: 7503.31,-3446.1 4223.31,-3446.1 4153.31,-3376.1 4153.31,-1891.1 4293.31,-1751.1 4293.31,-841.1 4513.31,-621.1 7503.31,-621.1

## Silkscreen, mask and mechanical layers (free items; w line width, h text height)
Top Overlay:
  drawing of 45 lines, arcs and shapes, not listed
  text "Medusa-AI v2.0" at 1043.31,1011.12 h200
  text "loggerhead.com" at 1043.31,771.08 h160
  text "medusa@loggerhead.com" at 1043.46,529.11 h160
  text "+   -" at 4172.44,-97.64 h60 r90
  text "+ -" at 3502.44,-227.64 h100
  text "Solar" at 52.44,-282.64 h60 r270
  text "Battery" at 3382.44,-385.06 h200
  text "Solar" at 62.44,-712.64 h60 r270
  text "OFF" at 4185.22,-902.64 h200 r90
  text "SOLAR" at 7371.09,-1051.1 h200 r90
  text "Coral USB" at 5062.62,-1091.97 h200 r90
  text "3V3" at 1594.33,-1365 h60 r90
  text "GND" at 1696.21,-1365 h60 r90
  text "CHG" at 1798.08,-1365 h60 r90
  text "FAULT" at 1899.29,-1365 h60 r90
  text "4V2" at 2000,-1365 h60 r90
  text "Coral USB" at 5592.44,-1390.42 h200
  text "ON" at 4215.22,-1792.64 h200 r90
  text "RIGHT" at 3918.31,-2536.1 h60 r90
  text "VCC5" at 3343.31,-2591.1 h60
  text "-" at 3013.31,-2596.09 h60
  text "Jump  / PPS To ADC" at 4668.31,-2691.1 h100 r90
  text "CAP" at 3123.31,-2701.1 h60
  text "HYDROPHONE" at 7361.09,-2766.1 h200 r90
  text "LEFT" at 3923.31,-3036.1 h60 r90
  text "Pi 4" at 1197.44,-3112.64 h200 r270
  text "SATELLITE" at 7371.09,-4241.1 h200 r90
  text "G" at 5112.64,-5196.1 h60 r90
  text "V5" at 5227.64,-5196.05 h60 r90
  text "Slp" at 5317.65,-5196.1 h60 r90
  text "Tx" at 5428.31,-5196.1 h60 r90
  text "RI" at 5533.31,-5196.1 h60 r90
  text "NetAv" at 5627.7,-5196.1 h60 r90
  text "Rx" at 5738.31,-5196.1 h60 r90
  text "medusa@loggerhead.com" at 2388.16,-5441.31 h160 r180
  text "loggerhead.com" at 2388.31,-5683.28 h160 r180
  text "Medusa-AI v2.0" at 2388.31,-5923.32 h200 r180
Mechanical 1:
  drawing of 168 lines, arcs and shapes, not listed
Mechanical 13:
  lines w10: 4393.31,-6196.1 5753.31,-6196.1 5753.31,-5201.1 4393.31,-5201.1 4393.31,-6196.1

## Text inside footprints (layer, text, board x,y; h text height)
C2: Top Overlay "+" at 3993.31,-1411.1 h19.68 r270
C31: Top Overlay "+" at 4323.31,-6011.1 h19.68 r270
P1: Top Overlay "1" at 2143.31,-4796.1 h50 r270; Top Overlay "2" at 2393.31,-4771.1 h50 r270; Top Overlay "39" at 2118.31,-2646.1 h50 r270; Top Overlay "40" at 2418.31,-2636.1 h50 r270